# EAGLE board TD Toolboard V3 (EAGLE 9.6.2), part 1 of 2
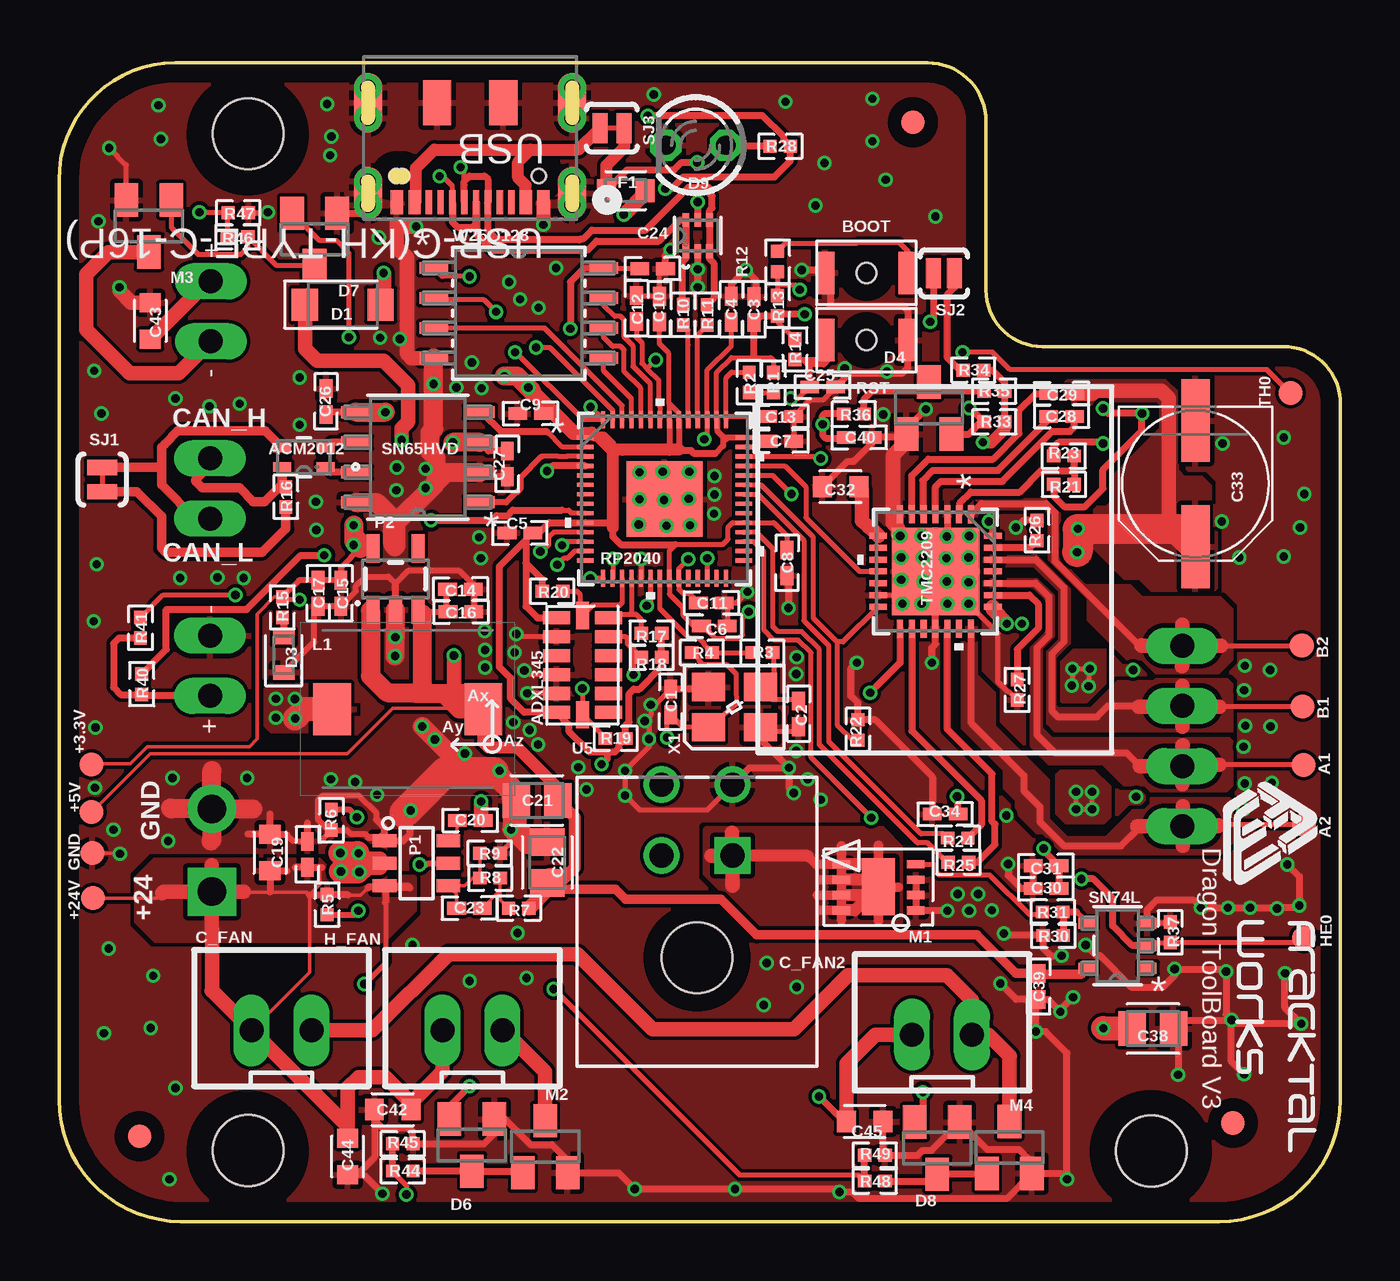
[diagram p0: board, top side]
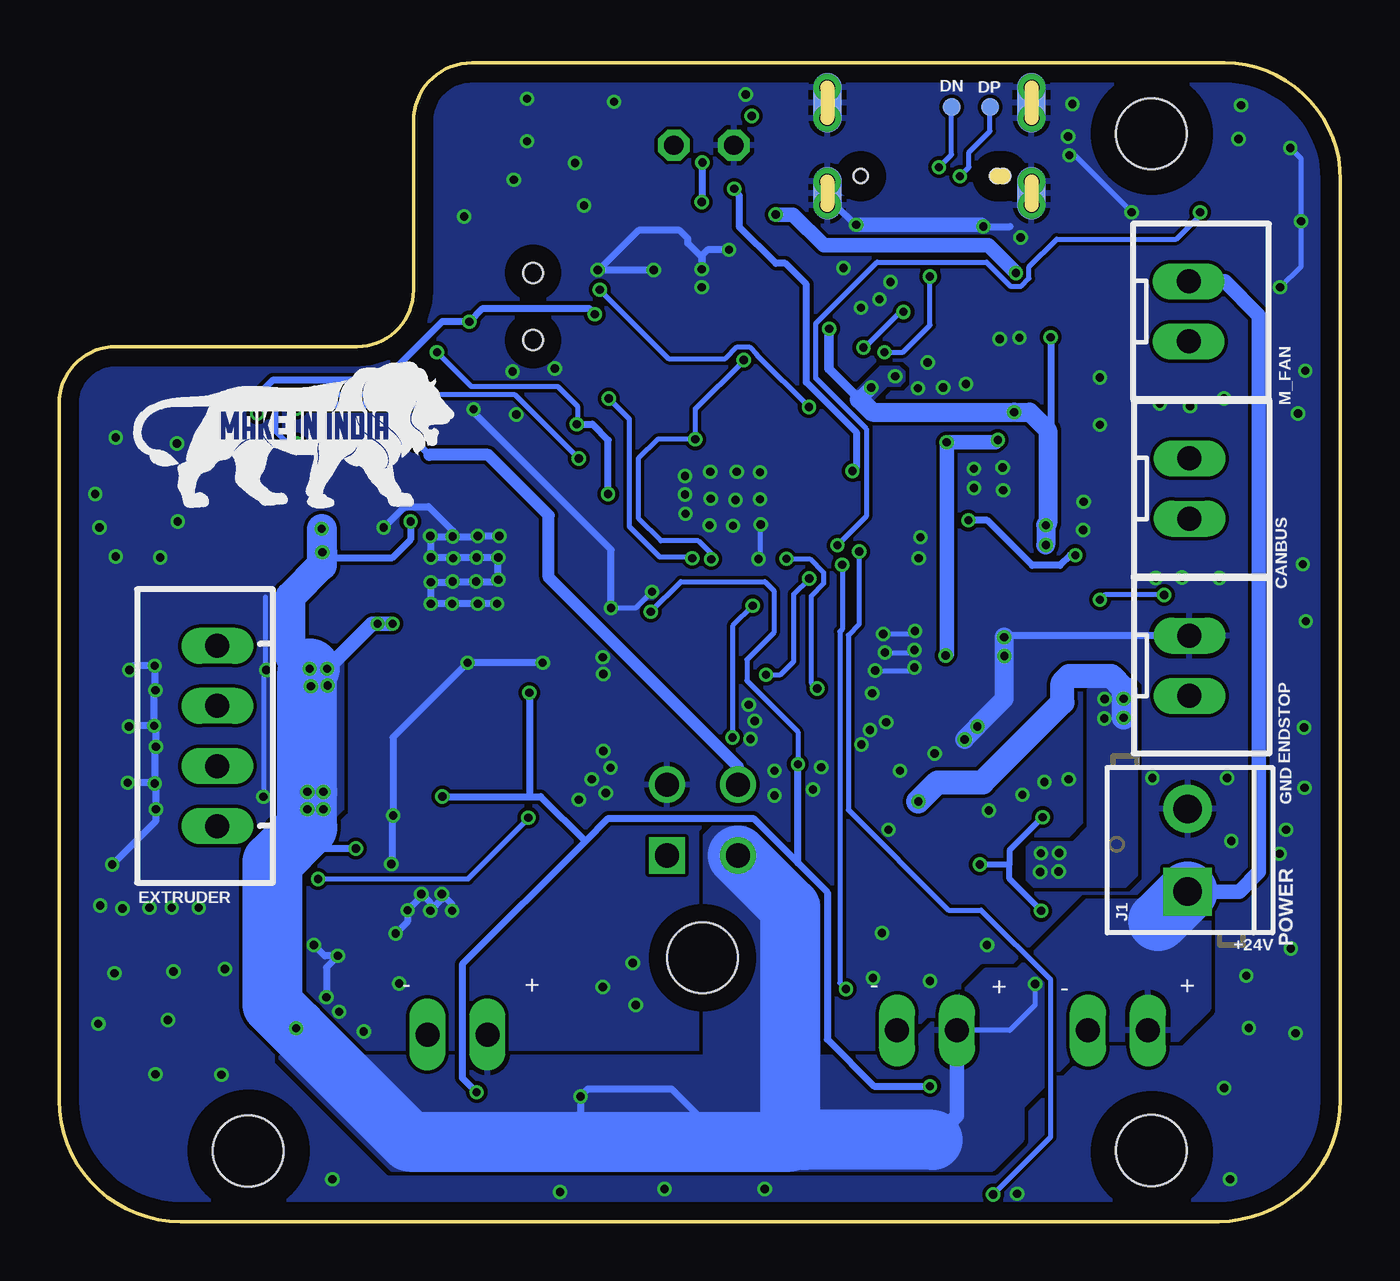
[diagram p1: board, bottom side, seen from below]

Size 54.2 x 49 mm. Coordinates in mm from the lower left corner, seen from the top.
Outline: 4.9,49 36.74,49 arc-90 39.21,46.53 39.21,39.38 arc90 41.59,37 51.8,37 arc-90 54.2,34.6 54.2,5.14 arc-90 49.06,0 5.15,0 arc-90 0,5.15 0,44.05 arc-90 4.9,49
Copper layers (1*16): Top 0.035mm / dielectric 1.5mm / Bottom 0.035mm
Design rules "LionCircuits *": minimum track width 6mil, minimum drill 0.35mm, track to track 6mil, track to pad 6mil, pad to pad 6mil, via to via 6mil, smd to smd 6mil, copper to edge 30mil, drill to drill 10mil, minimum pad ring 10mil, minimum via ring 5mil, stop-mask expansion 4mil, vias tented up to drill 0mil, thermal gap 8mil
Holes 3 mm at 8,46 8,3 46.2,2.99
tRestrict: area 5.5,43.5 to 10.5,48.5; area 43.7,0.5 to 48.7,5.5; area 5.5,0.5 to 10.5,5.5
bRestrict: area 5.5,43.5 to 10.5,48.5; area 5.5,0.4 to 10.5,5.4; area 43.7,0.5 to 48.7,5.5

## Footprints (pad centres in the part's own frame; a part is rotated, then mirrored left to right if it is on the bottom)
PAD.03X.04 = smd 1.016 x 1.016: P$1 0,0
B3U-1000P(M)-B = smd 0.8 x 1.8: 1 -1.75,0; 2 1.75,0 | hole 0.85: 0,0
CAPC1005X60 = smd 0.79 x 0.54: 1 -0.55,0; 2 0.545,0
CAPC1608X85 = smd 0.8 x 0.9: 1 -0.775,0; 2 0.775,0
CAPC2012X110 = smd 1.165 x 1.465: 1 -0.875,0; 2 0.875,0
PANASONIC_D = smd 3.5 x 1.2: + 2.67,0; - -2.67,0
JST-XH-02-PACKAGE-LONG-PAD = drill 1.016 long: 1 -1.27,0; 2 1.27,0
SODFL3718X115 = smd 1.115 x 1.361: 1 -1.6,0; 2 1.6,0
SOT-666_STM-L = smd 0.583 x 0.28: 1 -0.66,0.5; 2 -0.66,0; 3 -0.66,-0.5; 4 0.66,-0.5; 5 0.66,0; 6 0.66,0.5
LEDC1608X35N_FLAT-G = smd 0.612 x 0.912: A 0.75,0; C -0.75,0
SOT23 = smd 1 x 1.4: 1 -0.95,-1.1; 2 0.95,-1.1; 3 0,1.1
LED3MM = drill 0.813 octagon: A -1.27,0; K 1.27,0
JST-XH-04-PACKAGE-LONG-PAD = drill 1.016 long: 1 -3.81,0; 2 -1.27,0; 3 1.27,0; 4 3.81,0
FUSC1608X60N = smd 0.799 x 0.974: 1 -0.815,0; 2 0.815,0
FIDUCIAL_1MM = smd 1 x 1: 1 0,0
PAD.03X.03 = smd 0.762 x 0.762: P$1 0,0
SCREWTERMINAL-3.5MM-2 = drill 1.2 pad 2.032 square: 1 0,0 | drill 1.2 pad 2.032: 2 3.5,0
CON_430450400_MOL = drill 1.02 pad 1.52 square: 1 0,0 | drill 1.02 pad 1.52: 2 -3,0; 3 0,3; 4 -3,3 | hole 3: -1.5,-4.32
SMDRI74-680MT = smd 1.6 x 2.2: 1 -3.2,0; 2 3.2,0
ACM2012_TDK = smd 0.762 x 0.406: 1 -0.925,0.406; 2 -0.925,-0.406; 3 0.925,-0.406; 4 0.925,0.406
NMOSFET_WSD3066DN33 = smd 0.75 x 0.35: P$1 -1.575,1; P$2 -1.575,0.35; P$3 -1.575,-0.3; P$4 -1.575,-0.95; P$5 1.575,-0.95; P$6 1.575,-0.3; P$7 1.575,0.35; P$8 1.575,1 | smd 1.4 x 2.4: P$9 0,0
SOT-23-6 = smd 1 x 0.55: 1 -1.35,0.95; 2 -1.35,0; 3 -1.35,-0.95; 4 1.35,-0.95; 5 1.35,0; 6 1.35,0.95
SOT23-5 = smd 0.55 x 1.2: 1 -0.95,-1.3; 2 0,-1.3; 3 0.95,-1.3; 4 0.95,1.3; 5 -0.95,1.3
RESC1005X40 = smd 0.566 x 0.54: 1 -0.433,0; 2 0.433,0
SJ_2S-TRACE = smd 0.635 x 1.27: 1 -0.508,0; 2 0.508,0
SJ_2S-NO = smd 0.635 x 1.27: 1 -0.45,0; 2 0.45,0
IC57_RP2040-L = smd 0.708 x 0.179: 1 -3.351,2.6; 2 -3.351,2.2; 3 -3.351,1.8; 4 -3.351,1.4; 5 -3.351,1; 6 -3.351,0.6; 7 -3.351,0.2; 8 -3.351,-0.2; 9 -3.351,-0.6; 10 -3.351,-1; 11 -3.351,-1.4; 12 -3.351,-1.8; 13 -3.351,-2.2; 14 -3.351,-2.6; 29 3.351,-2.6; 30 3.351,-2.2; 31 3.351,-1.8; 32 3.351,-1.4; 33 3.351,-1; 34 3.351,-0.6; 35 3.351,-0.2; 36 3.351,0.2; 37 3.351,0.6; 38 3.351,1; 39 3.351,1.4; 40 3.351,1.8; 41 3.351,2.2; 42 3.351,2.6 | smd 0.179 x 0.708: 15 -2.6,-3.351; 16 -2.2,-3.351; 17 -1.8,-3.351; 18 -1.4,-3.351; 19 -1,-3.351; 20 -0.6,-3.351; 21 -0.2,-3.351; 22 0.2,-3.351; 23 0.6,-3.351; 24 1,-3.351; 25 1.4,-3.351; 26 1.8,-3.351; 27 2.2,-3.351; 28 2.6,-3.351; 43 2.6,3.351; 44 2.2,3.351; 45 1.8,3.351; 46 1.4,3.351; 47 1,3.351; 48 0.6,3.351; 49 0.2,3.351; 50 -0.2,3.351; 51 -0.6,3.351; 52 -1,3.351; 53 -1.4,3.351; 54 -1.8,3.351; 55 -2.2,3.351; 56 -2.6,3.351 | smd 3.2 x 3.2: 57 0,0
SOIC_128JVSIQ_WIN-L = smd 1.213 x 0.483: 1 -3.595,1.905; 2 -3.595,0.635; 3 -3.595,-0.635; 4 -3.595,-1.905; 5 3.595,-1.905; 6 3.595,-0.635; 7 3.595,0.635; 8 3.595,1.905
D8-L = smd 1.255 x 0.508: 1 -2.621,1.905; 2 -2.621,0.635; 3 -2.621,-0.635; 4 -2.621,-1.905; 5 2.621,-1.905; 6 2.621,-0.635; 7 2.621,0.635; 8 2.621,1.905
ADXL345_LGA14 = smd 1.145 x 0.55: 1 -1.097,2; 2 -1.097,1.2; 3 -1.097,0.4; 4 -1.097,-0.4; 5 -1.097,-1.2; 6 -1.097,-2; 8 1.097,-2; 9 1.097,-1.2; 10 1.097,-0.4; 11 1.097,0.4; 12 1.097,1.2; 13 1.097,2 | smd 0.55 x 1.145: 7 0,-2.098; 14 0,2.098
DBV5-L = smd 0.772 x 0.458: 1 -1.262,0.95; 2 -1.262,0; 3 -1.262,-0.95; 4 1.262,-0.95; 5 1.262,0.95
QFN28_5X5_3X8_EPAD_TRI = smd 0.757 x 0.255: 1 -2.423,1.5; 2 -2.423,1; 3 -2.423,0.5; 4 -2.423,0; 5 -2.423,-0.5; 6 -2.423,-1; 7 -2.423,-1.5; 15 2.423,-1.5; 16 2.423,-1; 17 2.423,-0.5; 18 2.423,0; 19 2.423,0.5; 20 2.423,1; 21 2.423,1.5 | smd 0.255 x 0.757: 8 -1.5,-2.423; 9 -1,-2.423; 10 -0.5,-2.423; 11 0,-2.423; 12 0.5,-2.423; 13 1,-2.423; 14 1.5,-2.423; 22 1.5,2.423; 23 1,2.423; 24 0.5,2.423; 25 0,2.423; 26 -0.5,2.423; 27 -1,2.423; 28 -1.5,2.423 | smd 3.7 x 3.7: 29 0,0
CONN12_KH-TYPE-C-16P = smd 0.52 x 1: 1 -3.1,1.1; 2 -2.35,1.1; 11 2.35,1.1; 12 3.1,1.1 | smd 0.27 x 1: 3 -1.75,1.1; 4 -1.25,1.1; 5 -0.75,1.1; 6 -0.25,1.1; 7 0.25,1.1; 8 0.75,1.1; 9 1.25,1.1; 10 1.75,1.1 | smd 1.2 x 2.2: 13 -4.32,0.725; 14 4.32,0.725 | smd 1.2 x 2.5: 15 -4.32,-3.1; 16 4.32,-3.1 | smd 1.2 x 1.9: 18 -1.4,-3.1; 19 1.4,-3.1 | drill 0.65 pad 0.65: 20 -4.32,1.225; 21 -4.32,0.225; 24 4.32,1.225; 25 4.32,0.225; 26 4.32,-2.45; 27 4.32,-3.75; 28 -4.32,-2.45; 29 -4.32,-3.75 | smd 1.2 x 2.5 bottom: 37 -4.32,-3.1; 41 4.32,-3.1 | smd 1.2 x 2.2 bottom: 39 -4.32,0.725; 43 4.32,0.725 | hole 0.6: -2.9,0; 3.125,0; 2.875,0
CRYSTAL_3225 = smd 1.4 x 1.2: P$1 -1.1,-0.85; P$2 1.1,-0.85; P$3 1.1,0.85; P$4 -1.1,0.85

## Placement (x,y rotation side)
3.3V  TEST-POINT3X4  [PAD.03X.04]  1.37,19.32 90 top
5V  TEST-POINT3X4  [PAD.03X.04]  1.37,17.32 90 top
24V  TEST-POINT3X4  [PAD.03X.04]  1.43,13.67 90 top
A1  TEST-POINT3X4  [PAD.03X.04]  52.64,19.31 90 top
A2  TEST-POINT3X4  [PAD.03X.04]  52.67,16.77 90 top
B1  TEST-POINT3X4  [PAD.03X.04]  52.59,21.78 90 top
B2  TEST-POINT3X4  [PAD.03X.04]  52.57,24.37 90 top
BOOT  B3U-1000P(M)-B  [B3U-1000P(M)-B]  34.15,40.12 0 top
C1  30pF  [CAPC1005X60]  25.87,21.98 90 top
C2  30pF  [CAPC1005X60]  31.28,21.47 90 top
C3  1uF  [CAPC1005X60]  29.4,38.57 90 top
C4  1uF  [CAPC1005X60]  28.44,38.58 90 top
C5  100nF  [CAPC1005X60]  19.49,29.12 180 top
C6  100nF  [CAPC1005X60]  27.72,25.18 0 top
C7  100nF  [CAPC1005X60]  30.53,33 0 top
C8  100nF  [CAPC1005X60]  30.79,27.85 270 top
C9  100nF  [CAPC1005X60]  19.94,34.17 180 top
C10  100nF  [CAPC1005X60]  25.39,38.59 90 top
C11  100nF  [CAPC1005X60]  27.6,26.16 0 top
C12  100nF  [CAPC1005X60]  24.42,38.61 90 top
C13  1uF  [CAPC1005X60]  30.53,34.04 0 top
C14  1uF  [CAPC1005X60]  16.98,26.74 0 top
C15  1uF  [CAPC1005X60]  11.92,26.57 270 top
C16  100nF  [CAPC1005X60]  17,25.79 0 top
C17  100nF  [CAPC1005X60]  10.96,26.57 270 top
C18  100nF  [CAPC1005X60]  10.5,15.53 90 top
C19  10uF  [CAPC1608X85]  8.92,15.6 90 top
C20  100nF  [CAPC1005X60]  17.39,16.96 0 top
C21  22uF  [CAPC2012X110]  20.21,17.81 180 top
C22  22uF  [CAPC2012X110]  20.65,15.18 90 top
C23  75pF  [CAPC1005X60]  17.36,13.25 180 top
C24  100nF  [CAPC1005X60]  25.11,40.29 0 top
C25  100nF  [CAPC1005X60]  32.3,35.29 180 top
C26  100nF  [CAPC1005X60]  11.29,34.68 90 top
C27  100nF  [CAPC1005X60]  18.96,32.04 270 top
C28  22nF  [CAPC1005X60]  42.41,34.05 0 top
C29  100nF  [CAPC1005X60]  42.41,35.01 180 top
C30  100nF  [CAPC1005X60]  41.75,14.08 0 top
C31  100nF  [CAPC1005X60]  41.75,15.05 0 top
C32  4.7uF  [CAPC1608X85]  33.06,31.07 0 top
C33  100uF  [PANASONIC_D]  48.07,31.2 270 top
C34  100nF  [CAPC1005X60]  37.48,17.23 180 top
C38  22uF  [CAPC2012X110]  46.27,8.16 0 top
C39  100nF  [CAPC1005X60]  41.44,9.94 270 top
C40  100nF  [CAPC1005X60]  33.85,33.16 0 top
C42  4.7uF  [CAPC1608X85]  14.11,4.73 180 top
C43  4.7uF  [CAPC1608X85]  3.85,38.08 90 top
C44  4.7uF  [CAPC1608X85]  12.21,2.75 270 top
C45  4.7uF  [CAPC1608X85]  34.08,4.23 0 top
C_FAN  JST-XH-02-PIN-LONG-PAD  [JST-XH-02-PACKAGE-LONG-PAD]  9.41,8.09 0 top
C_FAN2  JST-XH  [JST-XH-02-PACKAGE-LONG-PAD]  37.35,7.91 0 top
CANBUS  JST-XH-02-PIN-LONG-PAD  [JST-XH-02-PACKAGE-LONG-PAD]  6.39,31 270 bottom
D1  MBR0520LT1G  [SODFL3718X115]  12,38.77 0 top
D2  USBLC6-2P6SOT-666_STM-L  [SOT-666_STM-L]  27.01,41.69 90 top
D3  LED_G  [LEDC1608X35N_FLAT-G]  9.5,23.97 90 top
D4  BAT54S  [SOT23]  36.79,34.4 0 top
D6  BAT54S  [SOT23]  17.46,3.24 180 top
D7  BAT54S  [SOT23]  10.81,41.54 180 top
D8  BAT54S  [SOT23]  37.15,3.11 180 top
D9  LED_G  [LED3MM]  26.93,45.51 180 top
ENDSTOP  JST-XH-02-PIN-LONG-PAD  [JST-XH-02-PACKAGE-LONG-PAD]  6.39,23.5 270 bottom
EXTRUDER  JST-XH-04-PIN-LONG-PAD  [JST-XH-04-PACKAGE-LONG-PAD]  47.51,20.53 90 bottom
F1  FUSE_CHIP-0603(1608-METRIC)  [FUSC1608X60N]  23.97,43.6 180 top
FD4  FIDUCIAL  [FIDUCIAL_1MM]  49.66,4.17 0 top
FD5  FIDUCIAL  [FIDUCIAL_1MM]  3.4,3.61 0 top
FD6  FIDUCIAL  [FIDUCIAL_1MM]  36.12,46.48 0 top
GND  TEST-POINT3X4  [PAD.03X.04]  1.4,15.58 0 top
H_FAN  JST-XH-02-PIN-LONG-PAD  [JST-XH-02-PACKAGE-LONG-PAD]  17.49,8.09 0 top
HE0  TEST-POINT3X4  [PAD.03X.04]  52.67,12 0 top
IO1  TEST-POINT3  [PAD.03X.03]  16.45,47.13 0 bottom
IO2  TEST-POINT3  [PAD.03X.03]  14.82,47.13 0 bottom
J1  [SCREWTERMINAL-3.5MM-2]  6.46,13.95 90 bottom
J3  JST-MICROFIT  [CON_430450400_MOL]  28.49,15.48 0 top
L1  ASPI-0630HI-100M-T157X7X4  [SMDRI74-680MT]  14.74,21.67 0 top
L2  ACM2012  [ACM2012_TDK]  10.35,32.32 180 top
M1  NMOSFET_WSD3066DN33  [NMOSFET_WSD3066DN33]  34.66,14.16 180 top
M2  CJ3400  [SOT23]  20.56,3.16 0 top
M3  CJ3400  [SOT23]  3.8,42.1 180 top
M4  CJ3400  [SOT23]  40.2,3.13 0 top
M_FAN  JST-XH-02-PIN-LONG-PAD  [JST-XH-02-PACKAGE-LONG-PAD]  6.41,38.49 270 bottom
P1  TPS54202_BUCKCONV  [SOT-23-6]  15.12,15.15 0 top
P2  3.3V  [SOT23-5]  14.23,27.17 0 top
R1  200R  [RESC1005X40]  30.22,35.48 90 top
R2  1R  [RESC1005X40]  29.19,35.48 270 top
R3  1K  [RESC1005X40]  29.76,24.06 180 top
R4  NO-FIT  [RESC1005X40]  27.19,24.06 180 top
R5  511k  [RESC1005X40]  11.34,13.41 90 top
R6  105k  [RESC1005X40]  11.52,16.98 90 top
R7  49.9R  [RESC1005X40]  19.44,13.25 0 top
R8  100k  [RESC1005X40]  18.23,14.52 0 top
R9  13.3k  [RESC1005X40]  18.22,15.58 180 top
R10  27.4R  [RESC1005X40]  26.4,38.34 270 top
R11  27.4R  [RESC1005X40]  27.42,38.34 270 top
R12  1K  [RESC1005X40]  30.39,40.6 90 top
R13  DO NOT FIT (10K)  [RESC1005X40]  30.39,38.72 270 top
R14  100k  [RESC1005X40]  31.13,36.89 90 top
R15  49.9R  [RESC1005X40]  9.44,25.98 90 top
R16  120R  [RESC1005X40]  9.59,30.64 270 top
R17  4.7K  [RESC1005X40]  25.06,24.88 0 top
R18  4.7K  [RESC1005X40]  25.06,23.86 0 top
R19  4.7K  [RESC1005X40]  23.53,20.43 0 top
R20  4.7K  [RESC1005X40]  20.87,26.65 180 top
R21  10K  [RESC1005X40]  42.51,31.18 0 top
R22  10K  [RESC1005X40]  33.8,20.79 270 top
R23  1K  [RESC1005X40]  42.51,32.37 180 top
R24  1K  [RESC1005X40]  38.01,16.21 0 top
R25  1K  [RESC1005X40]  38.04,15.2 0 top
R26  220mΩ  [RESC1005X40]  41.36,29.22 270 top
R27  220mΩ  [RESC1005X40]  40.53,22.49 90 top
R28  49.9R  [RESC1005X40]  30.5,45.47 0 top
R30  20K  [RESC1005X40]  42.05,12.1 0 top
R31  27.4R  [RESC1005X40]  42.03,13.09 0 top
R33  4.7K  [RESC1005X40]  39.56,33.82 180 top
R34  4.12K  [RESC1005X40]  38.67,36 180 top
R35  2.37K  [RESC1005X40]  39.56,35.11 180 top
R36  2.37K  [RESC1005X40]  33.62,34.15 180 top
R37  10K  [RESC1005X40]  47,12.23 270 top
R40  1K  [RESC1005X40]  3.49,22.72 270 top
R41  10K  [RESC1005X40]  3.44,25.1 270 top
R44  27.4R  [RESC1005X40]  14.54,2.14 180 top
R45  20K  [RESC1005X40]  14.54,3.29 180 top
R46  27.4R  [RESC1005X40]  7.56,41.64 180 top
R47  20K  [RESC1005X40]  7.58,42.66 180 top
R48  27.4R  [RESC1005X40]  34.51,1.71 180 top
R49  20K  [RESC1005X40]  34.51,2.8 180 top
RST  B3U-1000P(M)-B  [B3U-1000P(M)-B]  34.15,37.27 180 top
SJ1  SOLDERJUMPERTRACE  [SJ_2S-TRACE]  1.82,31.38 270 top
SJ2  SOLDERJUMPERNO  [SJ_2S-NO]  37.43,40.09 180 top
SJ3  SOLDERJUMPERTRACE  [SJ_2S-TRACE]  23.38,46.24 180 top
TH0  TEST-POINT3X4  [PAD.03X.04]  52.08,35.04 0 top
U1  RP2040  [IC57_RP2040-L]  25.61,30.55 0 top
U2  W25Q128  [SOIC_128JVSIQ_WIN-L]  19.44,38.41 0 top
U3  SN65HVD  [D8-L]  15.18,32.32 180 top
U5  ADXL345  [ADXL345_LGA14]  22.14,23.53 0 top
U6  SN74L  [DBV5-L]  44.77,11.67 180 top
U7  TMC2209  [QFN28_5X5_3X8_EPAD_TRI]  37.07,27.49 270 top
U$1  [FWLOGO_SMALL]  48.1,18.81 270 top
U$2  [MAKEININDIA]  50.08,29.47 0 bottom
USB  USB-C(KH-TYPE-C-16P)  [CONN12_KH-TYPE-C-16P]  17.39,44.21 180 top
X1  CRYSTAL_TAXM12M4RLBDDT2T_3225  [CRYSTAL_3225]  28.56,21.75 0 top

## Library data of the parts
3.3V 5V 24V A1 A2 B1 B2 GND HE0 IO1 IO2 TH0 = SparkFun-Connectors
BOOT RST = Switch; CATEGORY: SWITCH; DESCRIPTION: Ultra-small Surface-mounting Tactile Switches with High Contact Reliability; LCSCPN#: C231329; MANUFACTURER: OMRON; OPERATING_TEMPERATURE: -25°C to +70°C at 60%RH max; PART_STATUS: ACTIVE; SERIES: B3U; TYPE: Tactile
C1 C2 = Fracktal Misc Lib; CATEGORY: Capacitor; LCSCPN#: C1570
C3 C4 C13-C15 = Fracktal Misc Lib; CATEGORY: Capacitor; LCSCPN#: C52923
C5-C12 C16-C18 C20 C24-C27 C29-C31 C34 C39 C40 = Fracktal Misc Lib; CATEGORY: Capacitor; LCSCPN#: C307331
C19 = Fracktal Misc Lib; CATEGORY: Capacitor; LCSCPN#: C194427
C21 C22 C38 = Fracktal Misc Lib; CATEGORY: Capacitor; LCSCPN#: C338080
C23 = Fracktal Misc Lib; CATEGORY: Capacitor; LCSCPN#: C37809
C28 = Fracktal Misc Lib; CATEGORY: Capacitor; LCSCPN#: C1532
C32 C42-C45 = Fracktal Misc Lib; CATEGORY: Capacitor; LCSCPN#: C162274
C33 = Fracktal Misc Lib; LCSCPN#: C128464; PROD_ID: CAP-12547
C_FAN C_FAN2 CANBUS ENDSTOP EXTRUDER H_FAN M_FAN = Rembrandt Electronics - JST XH Connectors v1-0
D1 = Diode; CATEGORY: Diode; DESCRIPTION: DIODE SCHOTTKY 20V 500MA SOD123; MANUFACTURER: ON Semiconductor; MPN: MBR0520LT1G; SUB-CATEGORY: Schottky
D2 = 2023-04-02_04-17-07_Library; COPYRIGHT: Copyright (C) 2023 Ultra Librarian. All rights reserved.; LCSCPN#: C2827693; MANUFACTURER_PART_NUMBER: USBLC6-2P6; MFR_NAME: STMicroelectronics
D3 = LED; CATEGORY: LED; COLOR: GREEN; DESCRIPTION: CHIP LED FLAT; LCSCPN#: C72043; SUB-CATEGORY: CHIP; TYPE: FLAT_TOP
D4 D6-D8 = Fracktal Misc Lib; LCSCPN#: C47546
D9 = led; LCSCPN#: C72043
F1 = Circuit-Protection; CATEGORY: Circuit-Protection; LCSCPN#: C261937; SUB-CATEGORY: Fuse
FD4-FD6 = CDC Library
J1 = SparkFun-Connectors; PROD_ID: CONN-08399
J3 = Fracktal Misc Lib; COPYRIGHT: Copyright (C) 2023 Ultra Librarian. All rights reserved.; MANUFACTURER_PART_NUMBER: 430450400; MFR_NAME: Molex Connector Corporation
L1 = Fracktal Misc Lib; LCSCPN#: C3000391
L2 = 2023-04-02_14-21-16_Library; COPYRIGHT: Copyright (C) 2023 Ultra Librarian. All rights reserved.; LCSCPN#: C3029258; MANUFACTURER_PART_NUMBER: ACM2012-201-2P-T002; MFR_NAME: TDK
M1 = Fracktal Misc Lib; LCSCPN#: C148386
M2-M4 = Transistor; CATEGORY: Transistor; DESCRIPTION: MOSFET N-CH 100V 0.17A SOT-23; DRAIN_CURRENT: 170mA; LCSCPN#: C19019; MANUFACTURER: ON Semiconductor; MPN: BSS123L; OPERATING_TEMP: -55°C ~ 150°C; PART_STATUS: Active; ROHS_COMPLIANT: Yes; SUB-CATEGORY: MOSFET; THERMALLOSS: 360mW; TYPE: N-Channel
P1 = Fracktal Misc Lib; LCSCPN#: C191884
P2 = SparkFun-IC-Power; LCSCPN#: C51118; PROD_ID: VREG-12457
R1 = Fracktal Misc Lib; CATEGORY: Resistor; LCSCPN#: C25087; SUB-CATEGORY: Fixed
R2 = Fracktal Misc Lib; CATEGORY: Resistor; LCSCPN#: C25086; SUB-CATEGORY: Fixed
R3 R12 R23-R25 R40 = Fracktal Misc Lib; CATEGORY: Resistor; LCSCPN#: C25543; SUB-CATEGORY: Fixed
R4 R13 = Fracktal Misc Lib; CATEGORY: Resistor; LCSCPN#: NO-FIT; SUB-CATEGORY: Fixed
R5 = Fracktal Misc Lib; CATEGORY: Resistor; LCSCPN#: C3037035; SUB-CATEGORY: Fixed
R6 = Fracktal Misc Lib; CATEGORY: Resistor; LCSCPN#: C2933067; SUB-CATEGORY: Fixed
R7 R15 R28 = Fracktal Misc Lib; CATEGORY: Resistor; LCSCPN#: C25120; SUB-CATEGORY: Fixed
R8 R14 = Fracktal Misc Lib; CATEGORY: Resistor; LCSCPN#: C25741; SUB-CATEGORY: Fixed
R9 = Fracktal Misc Lib; CATEGORY: Resistor; LCSCPN#: C2974007; SUB-CATEGORY: Fixed
R10 R11 R31 R44 R46 R48 = Fracktal Misc Lib; CATEGORY: Resistor; LCSCPN#: C31439; SUB-CATEGORY: Fixed
R16 = Fracktal Misc Lib; CATEGORY: Resistor; LCSCPN#: C25079; SUB-CATEGORY: Fixed
R17-R20 R33 = Fracktal Misc Lib; CATEGORY: Resistor; LCSCPN#: C304616; SUB-CATEGORY: Fixed
R21 R22 R37 R41 = Fracktal Misc Lib; CATEGORY: Resistor; LCSCPN#: C25744; SUB-CATEGORY: Fixed
R26 R27 = Fracktal Misc Lib; CATEGORY: Resistor; LCSCPN#: C705474; SUB-CATEGORY: Fixed
R30 R45 R47 R49 = Fracktal Misc Lib; CATEGORY: Resistor; LCSCPN#: C25765; SUB-CATEGORY: Fixed
R34 = Fracktal Misc Lib; CATEGORY: Resistor; LCSCPN#: C227106; SUB-CATEGORY: Fixed
R35 R36 = Fracktal Misc Lib; CATEGORY: Resistor; LCSCPN#: C425373; SUB-CATEGORY: Fixed
SJ1-SJ3 = SparkFun-Retired
U1 = 2023-03-26_17-59-48_Library; COPYRIGHT: Copyright (C) 2023 Ultra Librarian. All rights reserved.; LCSCPN#: C2040; MANUFACTURER_PART_NUMBER: RP2040; MFR_NAME: Raspberry Pi
U2 = Fracktal Misc Lib; COPYRIGHT: Copyright (C) 2023 Ultra Librarian. All rights reserved.; LCSCPN#: C97521; MANUFACTURER_PART_NUMBER: W25Q128JVSIQ; MFR_NAME: Winbond
U3 = Fracktal Misc Lib; COPYRIGHT: Copyright (C) 2023 Ultra Librarian. All rights reserved.; LCSCPN#: C14019; MANUFACTURER_PART_NUMBER: SN65HVD1050DR; MFR_NAME: Texas Instruments
U5 = Sensor; CATEGORY: SENSOR; DESCRIPTION: Digital Accelerometer; LCSCPN#: C9667; MANUFACTURER: ANALOG DEVICES; MPN: ADXL345BCCZ-RL; OPERATING_TEMPERATURE: −55°C to +105°C; PART_STATUS: ACTIVE; ROHS_COMPLIANT: RoHS Compliant; SERIES: ADXL345; SUB-CATEGORY: Accelerometer; TYPE: 3-Axis Digital MEMS Accelerometer
U6 = 2023-03-28_15-41-49_Library; COPYRIGHT: Copyright (C) 2023 Ultra Librarian. All rights reserved.; LCSCPN#: C7836; MANUFACTURER_PART_NUMBER: SN74LVC1G17DBVR; MFR_NAME: Texas Instruments
U7 = Fracktal Misc Lib; COPYRIGHT: Copyright (C) 2023 Ultra Librarian. All rights reserved.; DIGI-KEY_PART_NUMBER_1: 1460-1398-2-ND; DIGI-KEY_PART_NUMBER_2: 1460-1398-1-ND; DIGI-KEY_PART_NUMBER_3: 1460-1398-6-ND; DIGI-KEY_PART_NUMBER_4: 1460-TMC2209-LA-TTR-NDL; LCSCPN#: C2150710; MANUFACTURER_PART_NUMBER: TMC2209-LA-T; MFR_NAME: Trinamic
U$1 U$2 = FracktalWorks_Eagle_Library
USB = Fracktal Misc Lib; DATASHEET: https://datasheet.lcsc.com/lcsc/2009111434_Shenzhen-Kinghelm-Elec-KH-TYPE-C-16P_C709357.pdf; LCSCPN#: C709357; VENDOR: LCSC
X1 = Fracktal Misc Lib; LCSCPN#: C133334

## Nets
+1.1V [POWER]: C4.1 C11.1 C12.1 U1.23 U1.45 U1.50
+3.3V [POWER]: 3.3V.P$1 C3.1 C5.1 C6.1 C7.1 C8.1 C9.1 C10.1 C15.1 C17.1 C24.1 C26.1 C34.1 D4.2 D6.2 D7.2 D8.2 P2.5 R1.2 R13.2 R14.2 R15.2 R17.2 R18.2 R19.2 R20.2 R21.1 R33.2 R41.1 SJ2.2 U1.1 U1.10 U1.22 U1.33 U1.42 U1.44 U1.48 U1.49 U2.8 U3.5 U5.1 U5.6 U7.15
+5V [POWER]: 5V.P$1 C14.1 C16.1 C21.1 C22.1 C27.1 C39.1 D1.1 L1.2 P2.1 P2.3 R7.2 U3.3 U6.5
+24V [POWER]: 24V.P$1 C18.1 C19.1 C29.1 C30.2 C31.2 C33.+ C38.1 C42.1 C43.1 C44.1 C45.1 C_FAN2.1 C_FAN.1 H_FAN.1 J1.1 J3.2 M_FAN.1 P1.3 R5.2 U7.22 U7.28
A1 [POWER]: A1.P$1 EXTRUDER.2 U7.24
A2 [POWER]: A2.P$1 EXTRUDER.1 U7.21
ADC_AVDD: C13.1 R2.1 U1.43
ADC_R: R1.1 R2.2
B1 [POWER]: B1.P$1 EXTRUDER.3 U7.26
B2 [POWER]: B2.P$1 EXTRUDER.4 U7.1
BCBOOT: C20.1 P1.6
BRA: R27.2 U7.23
BRB: R26.2 U7.27
CAN1_N [DIFF]: L2.2 U3.6
CAN1_P [DIFF]: L2.1 U3.7
CAN_N [DIFF]: CANBUS.2 L2.3 SJ1.1
CAN_P [DIFF]: CANBUS.1 L2.4 R16.1
CAN_RX: U1.2 U3.4
CAN_TX: U1.3 U3.1
CNT: R16.2 SJ1.2
DIR: R25.2 U7.19
E0_DIAG: U1.39 U7.11
E0_DIR: R25.1 U1.32
E0_EN: R23.2 U1.40
E0_STEP: R24.1 U1.36
E0_UART: R22.2 U1.37 U7.14
ENDSTOP_X: R40.1 U1.9
EX: ENDSTOP.2 R40.2 R41.2
FAN0: R44.2 R45.2 U1.11
FAN0G: D6.3 M2.1 R44.1
FAN1: R46.2 R47.2 U1.12
FAN1G: D7.3 M3.1 R46.1
FAN2: R48.2 R49.2 U1.13
FAN2G: D8.3 M4.1 R48.1
GND [POWER]: BOOT.1 C1.2 C2.1 C3.2 C4.2 C5.2 C6.2 C7.2 C8.2 C9.2 C10.2 C11.2 C12.2 C13.2 C14.2 C15.2 C16.2 C17.2 C18.2 C19.2 C21.2 C22.2 C24.2 C25.1 C26.2 C27.2 C30.1 C31.1 C32.1 C33.- C34.2 C38.2 C39.2 C40.2 C42.2 C43.2 C44.2 C45.2 D2.2 D3.C D4.1 D6.1 D7.1 D8.1 D9.K ENDSTOP.1 GND.P$1 J1.2 J3.3 M1.P$1 M1.P$2 M1.P$3 M2.2 M3.2 M4.2 P1.1 P2.2 R6.1 R9.1 R22.1 R26.1 R27.1 R30.1 R37.1 R45.1 R47.1 R49.1 RST.1 U1.19 U1.57 U2.4 U3.2 U3.8 U5.2 U5.4 U5.5 U6.3 U7.3 U7.7 U7.13 U7.18 U7.29 USB.1 USB.12 USB.13 USB.14 USB.15 USB.16 USB.18 USB.19 USB.20 USB.21 USB.24 USB.25 USB.26 USB.27 USB.28 USB.29 USB.37 USB.39 USB.41 USB.43 X1.P$2 X1.P$4
GPIOLED: D9.A R28.1
HE0: HE0.P$1 R37.2 U1.31 U6.2
HE0_PWR [POWER]: J3.1 M1.P$5 M1.P$6 M1.P$7 M1.P$8 M1.P$9
HE0A: R30.2 R31.2 U6.4
HE0B: M1.P$4 R31.1
I2C_SCL: U1.35
I2C_SDA: U1.34
LDOLED: D3.A R15.1
LED: R28.2 U1.4
N$1: H_FAN.2 M2.3
N$3: M3.3 M_FAN.2
N$4: C_FAN2.2 C_FAN.2 M4.3
OSC_IN: C1.1 R4.2 U1.20 X1.P$1
OSC_OUT: R3.2 R4.1 U1.21
QSPI_SCK: U1.52 U2.6
QSPI_SD0: U1.53 U2.5
QSPI_SD1: U1.55 U2.2
QSPI_SD2: U1.54 U2.3
QSPI_SD3: U1.51 U2.7
QSPI_SS: R12.1 R13.1 U1.56 U2.1
RESET: C25.2 R14.1 RST.2 U1.26
SPI0_CS: U1.28
SPI0_MISO: U1.27
SPI0_MOSI: U1.30
SPI0_SCK: U1.29
SPI1_CS: R19.1 U1.16 U5.7
SPI1_MISO: R18.1 U1.15 U5.12
SPI1_MOSI: R17.1 U1.18 U5.13
SPI1_SCK: R20.1 U1.17 U5.14
STEP: R24.2 U7.16
SWB: BOOT.2 R12.2
SWCLK: U1.24
SWDIO: U1.25
TH0: C40.1 R36.2 TH0.P$1 U1.38
TH0A: J3.4 R33.1 R34.1 R35.1
TH0B: D4.3 R35.2 R36.1
TH0C: R34.2 SJ2.1
TMC5V: C32.2 U7.8
TMCCPI: C28.1 U7.5
TMCCPO: C28.2 U7.4
TMCENN: R21.2 R23.1 U7.2
TMCVCP: C29.2 U7.6
USB1_N [DIFF]: D2.3 D2.4 IO1.P$1 R11.1 USB.5 USB.7
USB1_P [DIFF]: D2.1 D2.6 IO2.P$1 R10.1 USB.6 USB.8
USB_N [DIFF]: R11.2 U1.46
USB_P [DIFF]: R10.2 U1.47
VBUS [POWER]: SJ3.2 USB.2 USB.11
VBUS1 [POWER]: D2.5 F1.2 SJ3.1
VBUS3 [POWER]: D1.2 F1.1
VRC: C23.1 R7.1 R8.2
VREGEN: P1.5 R5.1 R6.2
VREGFB: C23.2 P1.4 R8.1 R9.2
VREGO: C20.2 L1.1 P1.2
XR: C2.2 R3.1 X1.P$3